# Altium PCB SahinbeyTeamCMSv1.0.PcbDoc
Units mm, origin at the board's own origin, x right, y up, seen from the top; angles counter-clockwise.
Board outline 60 x 60 mm, 2 copper layers (Top Layer, Bottom Layer), stack 1.535 mm thick; 40 components, 32 nets, 190 pads, 130 vias.
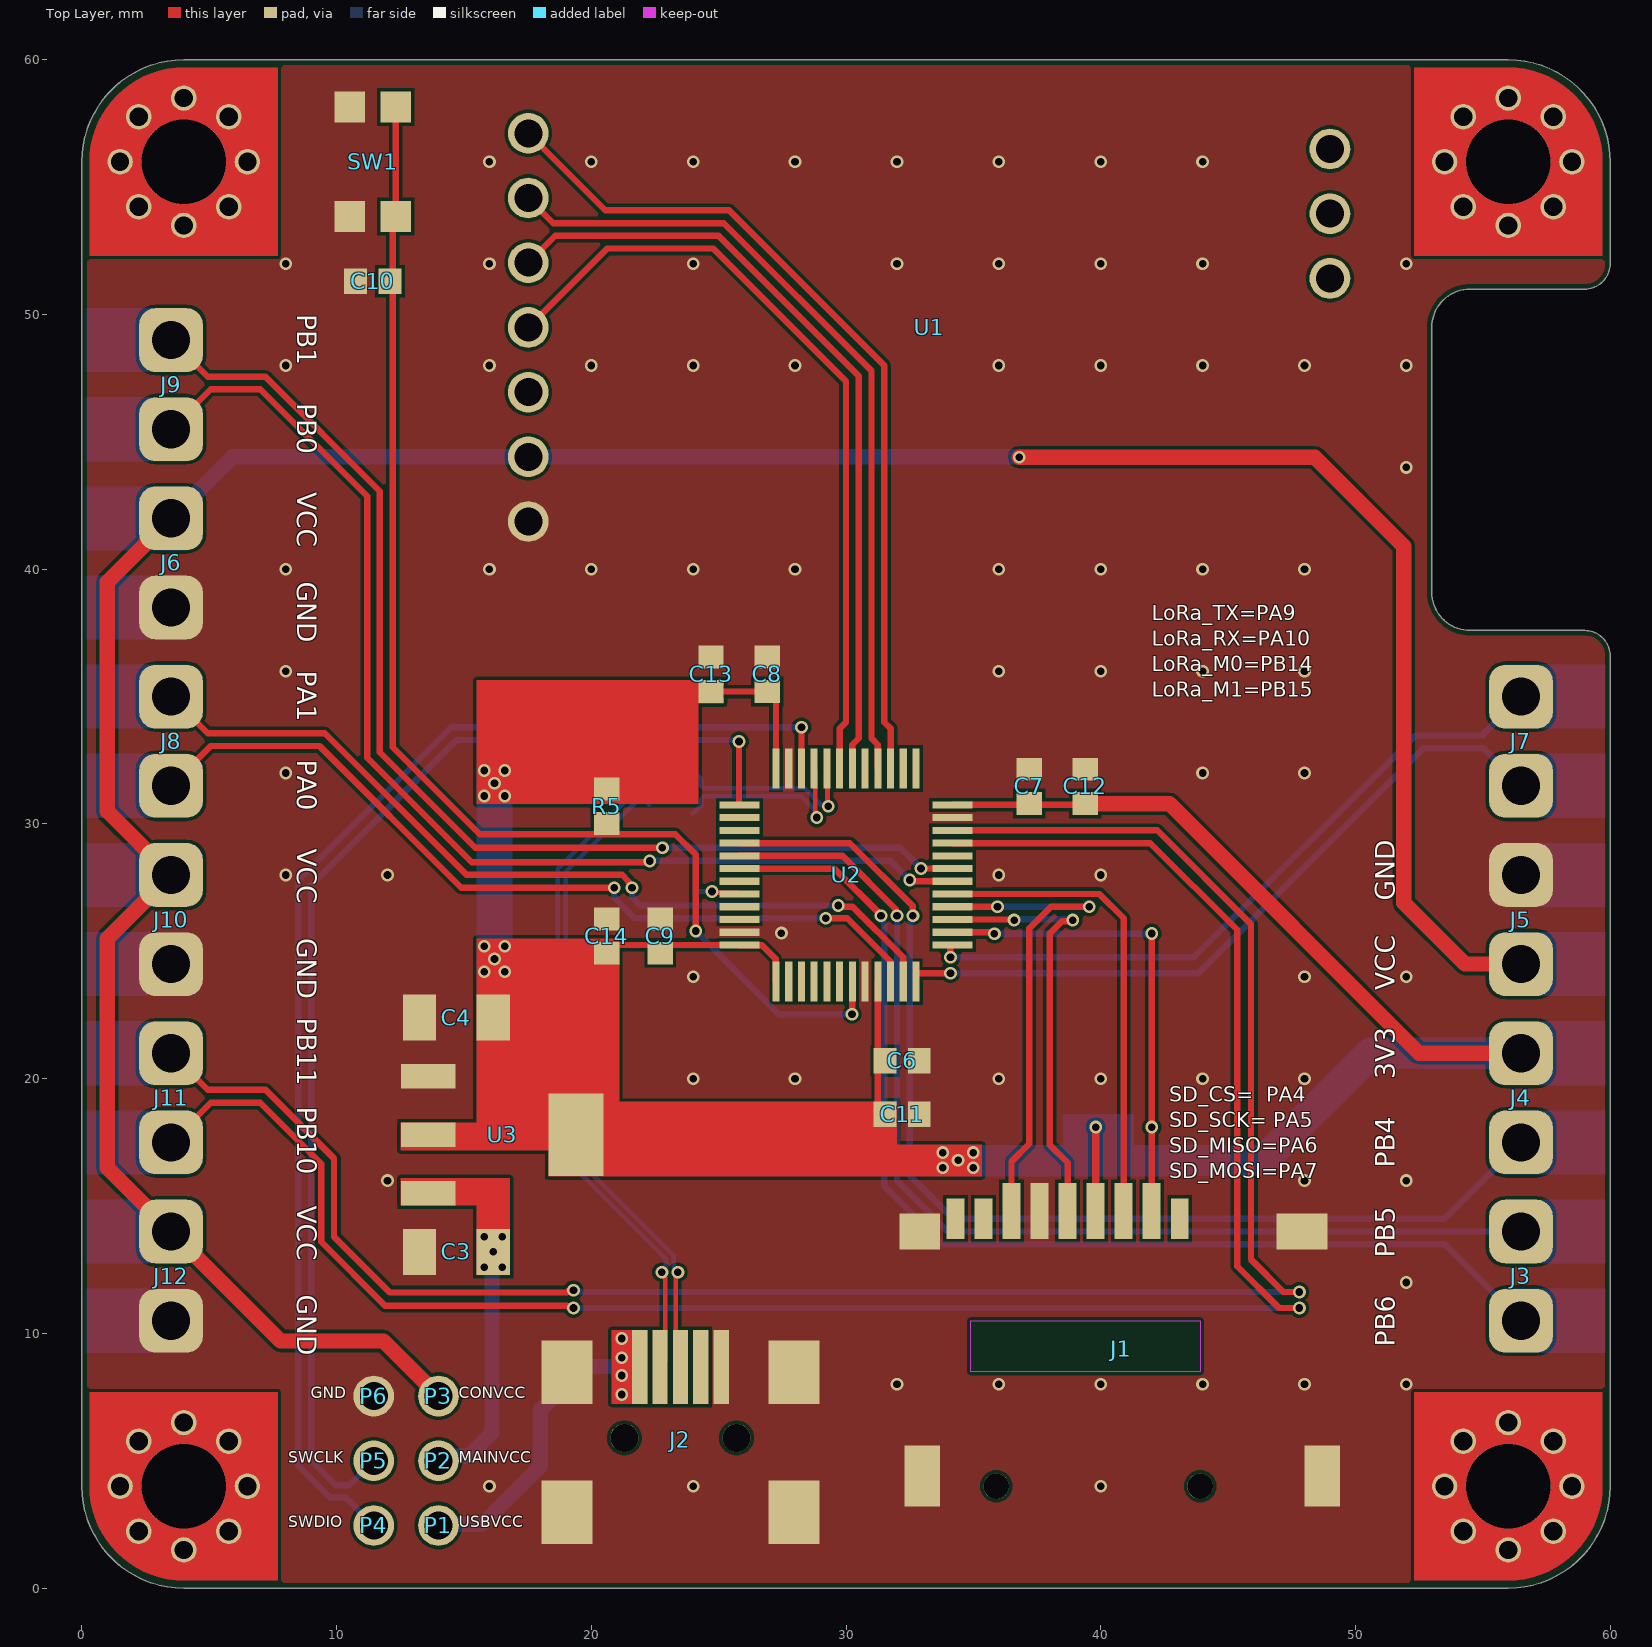
[diagram p0: Top Layer view]
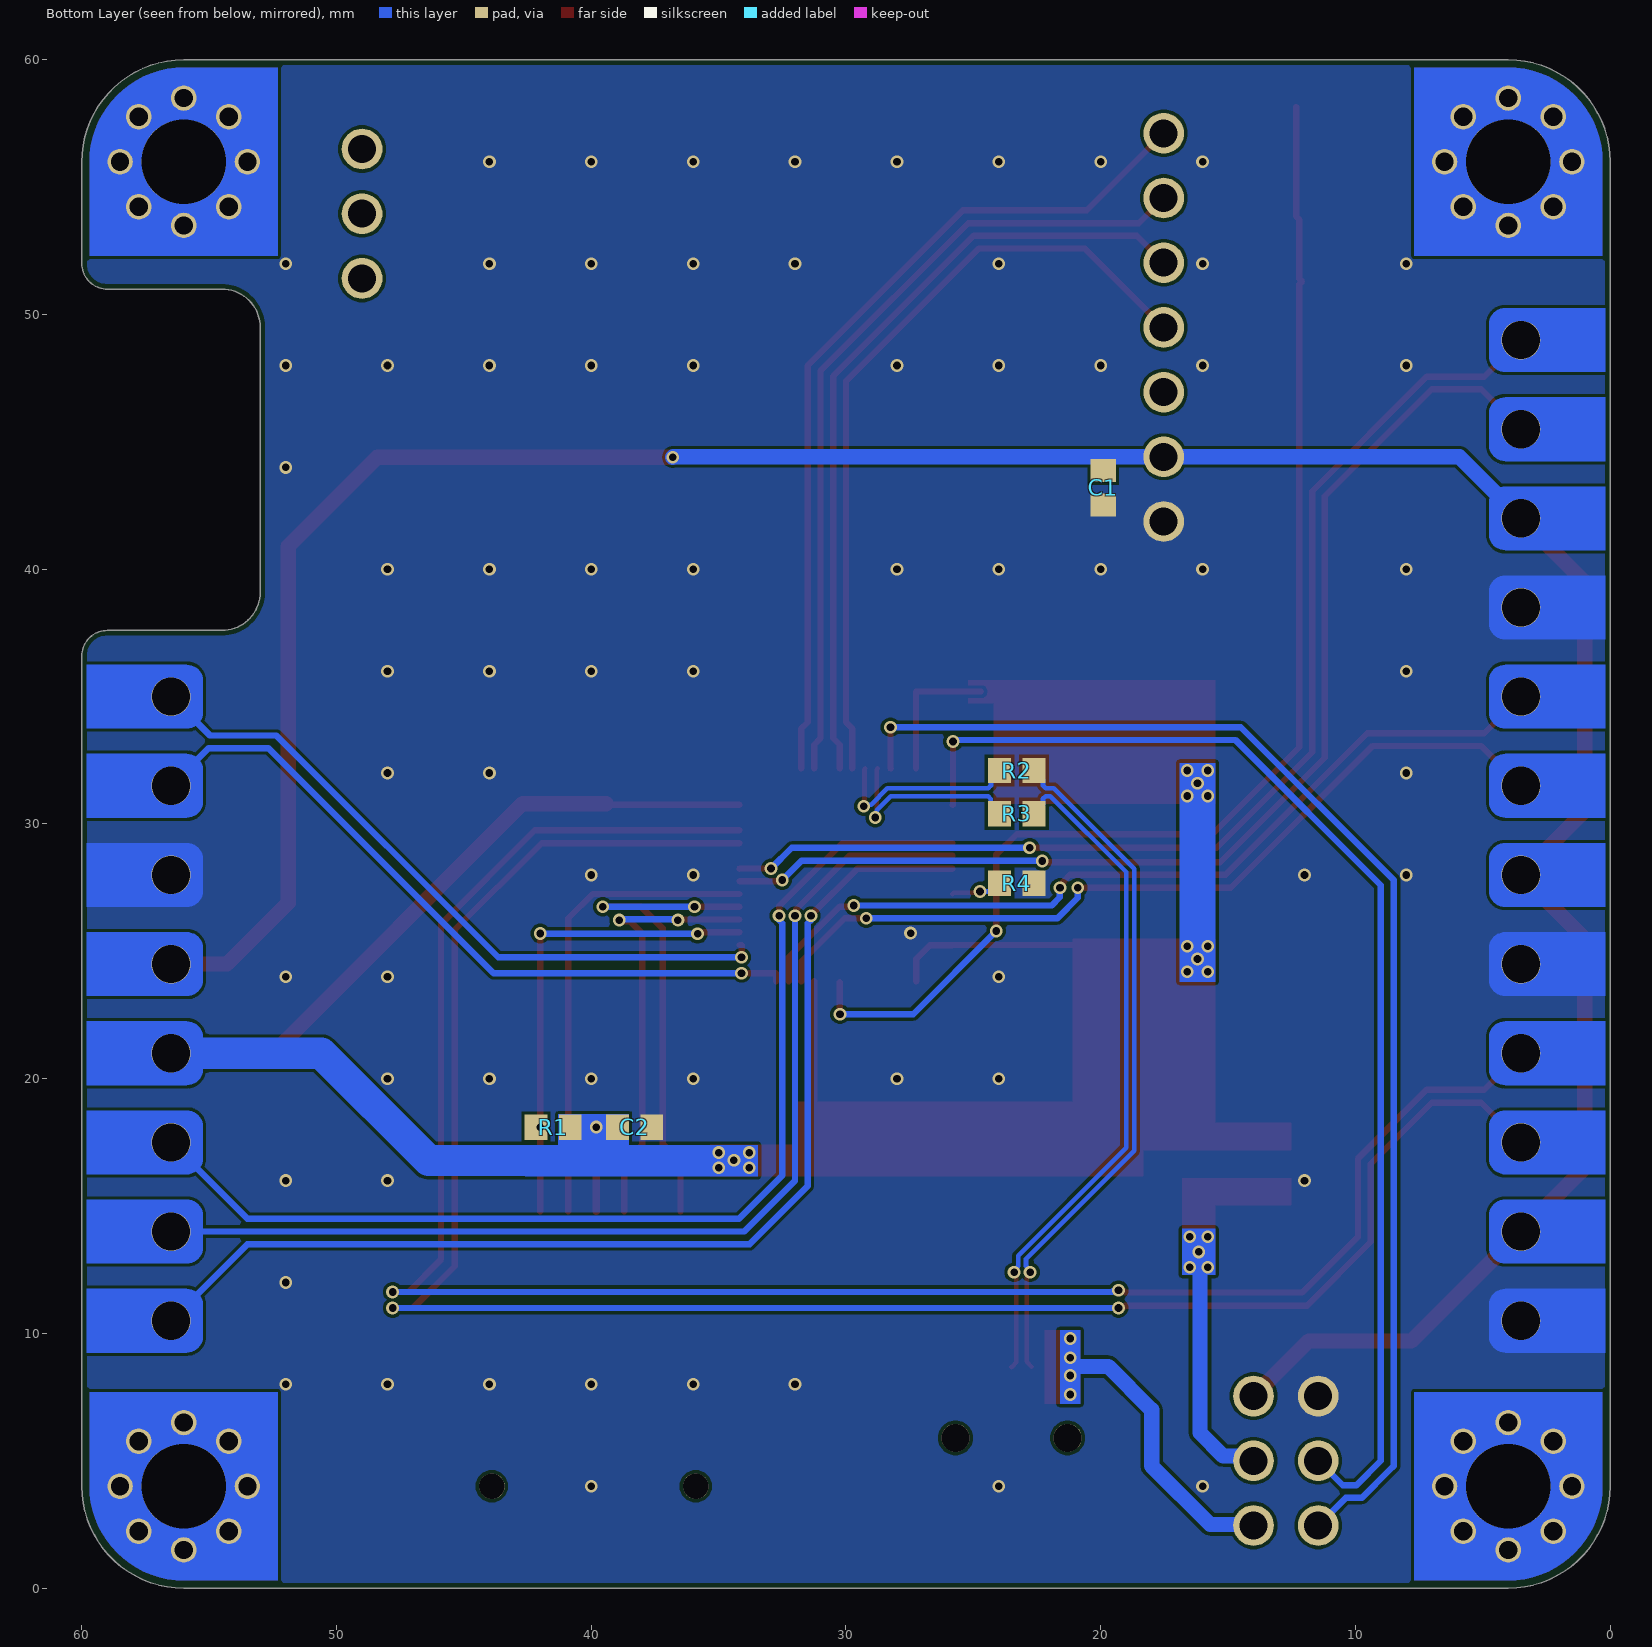
[diagram p1: Bottom Layer view, seen from below]
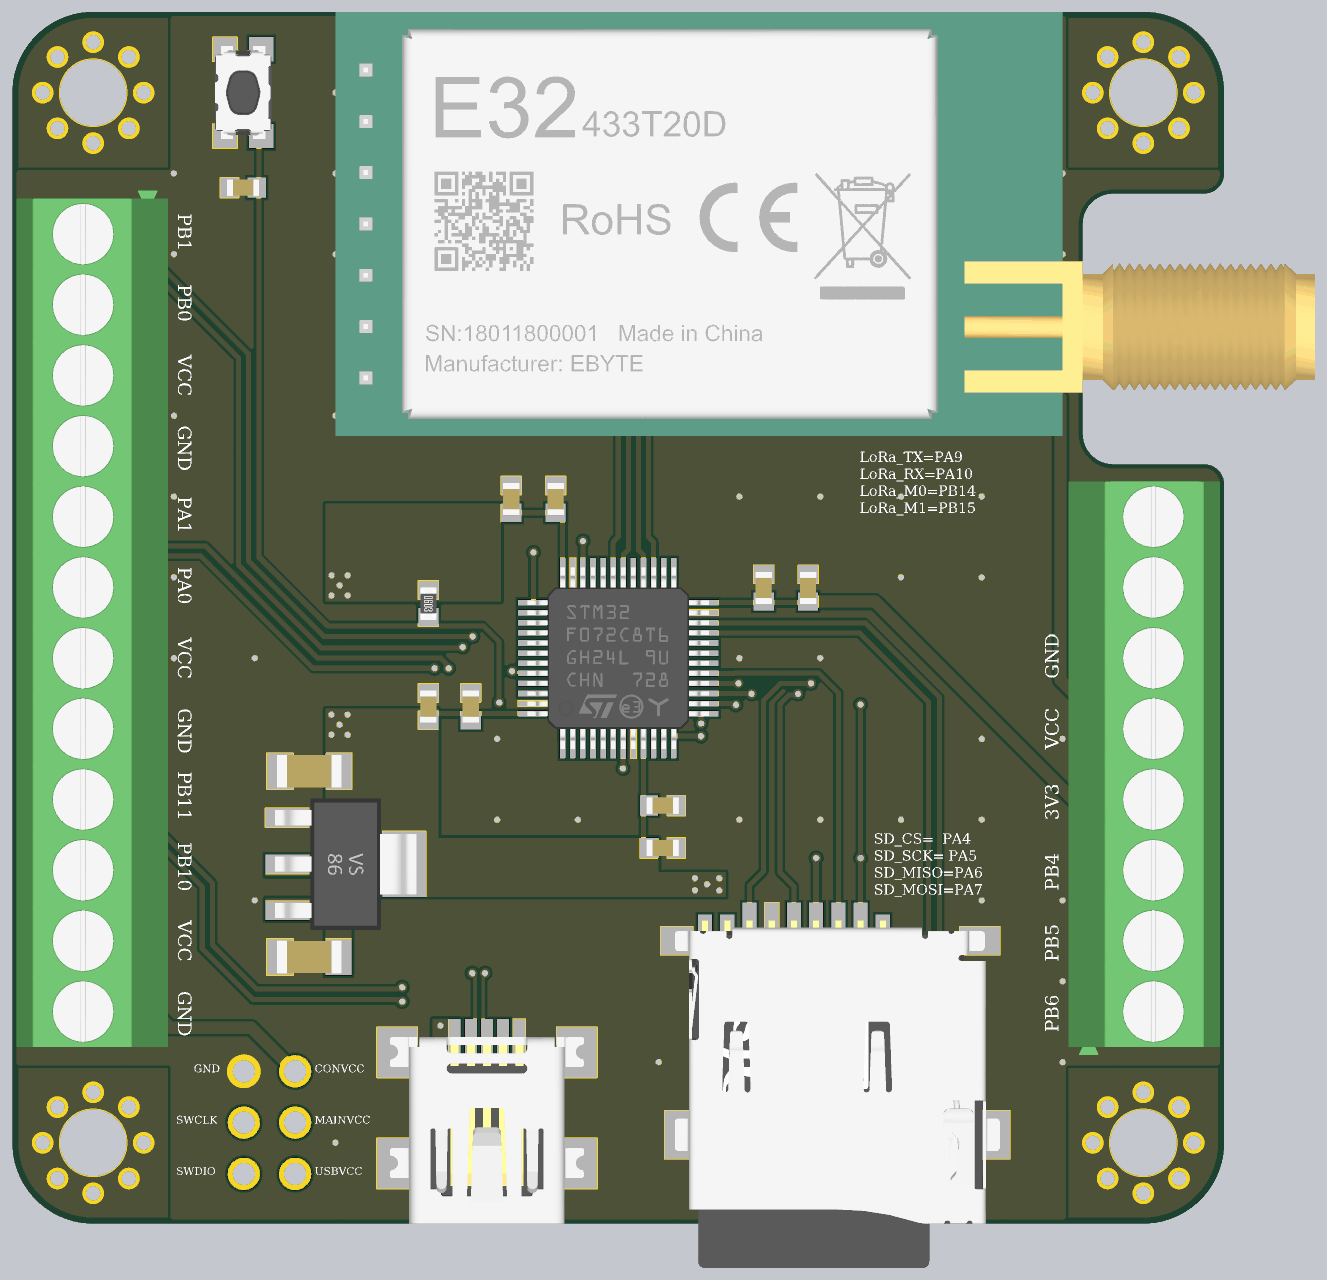
[diagram p2: 3D render of the assembled board from above, using the file's embedded part models]
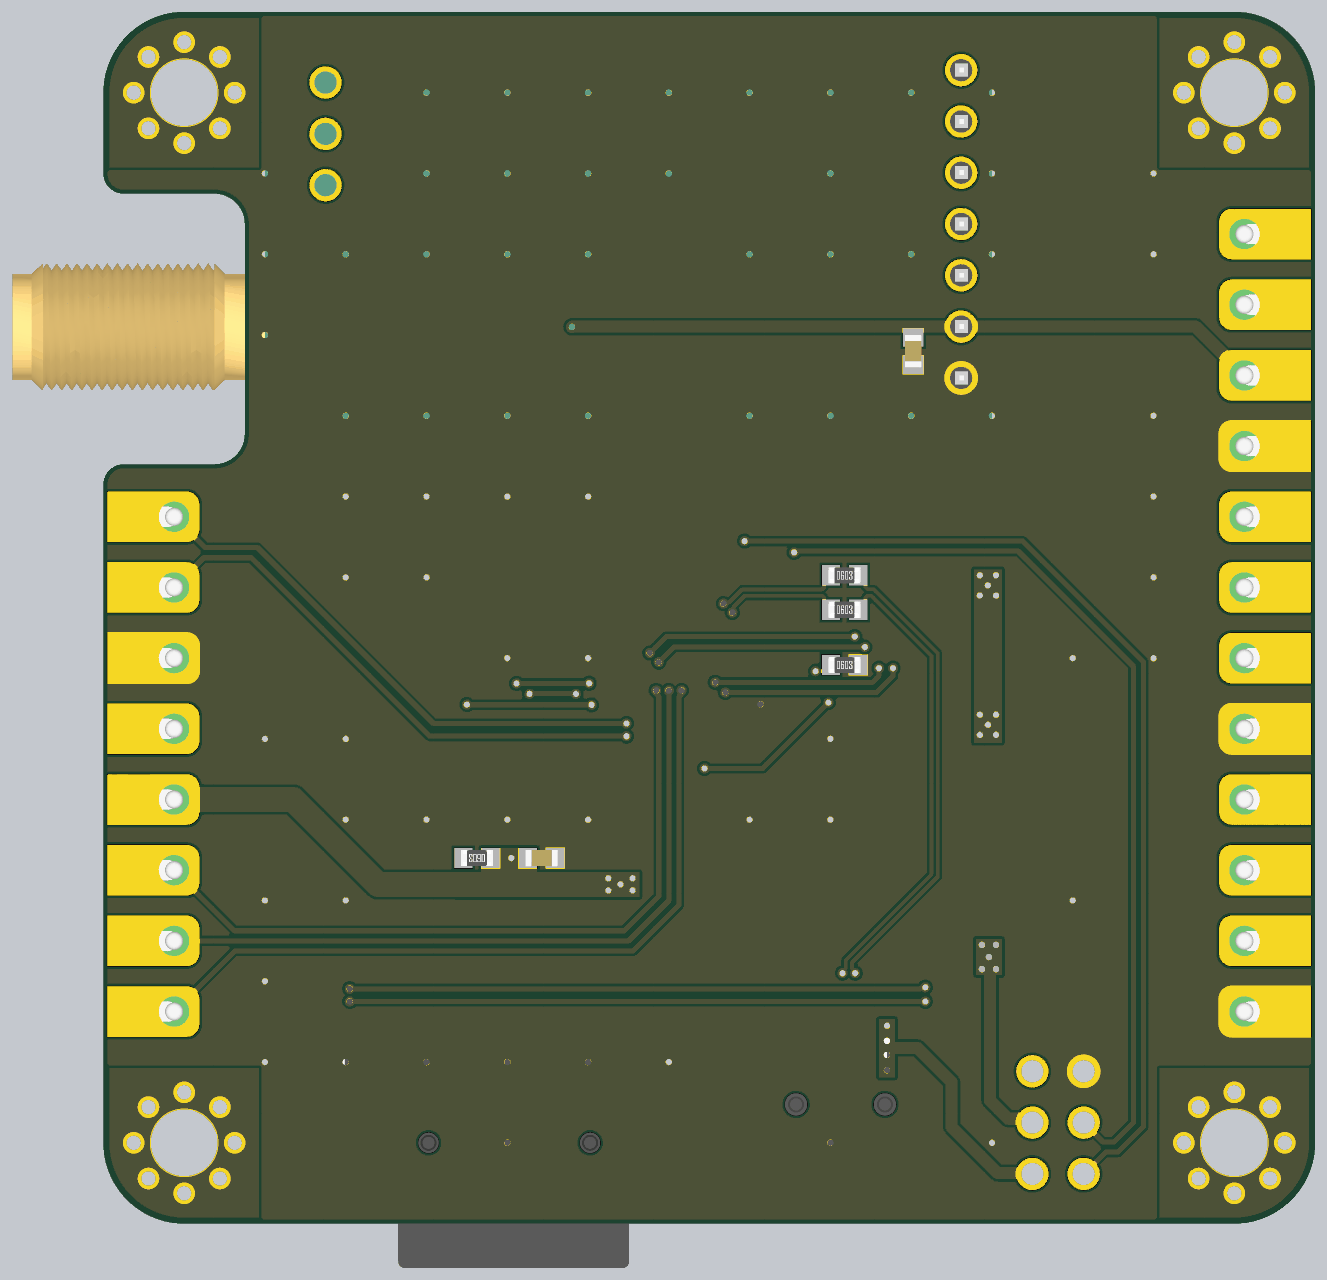
[diagram p3: 3D render of the assembled board from below, using the file's embedded part models]

## Layer stack, top to bottom
Top Solder: solder mask 0.0305, Solder Resist, Dk 3.5
Top Layer: signal copper 0.035
Dielectric 1: dielectric 1.465, FR-4, Dk 4.8
Bottom Layer: signal copper 0.035
Bottom Solder: solder mask 0.0305, Solder Resist, Dk 3.5

## Board outline
4,0 56,0 ccw(c56,4) 60,4 60,36.6 ccw(c59,36.6) 59,37.6 54.5,37.6 cw(c54.5,39.1) 53,39.1 53,49.5 cw(c54.5,49.5) 54.5,51 59,51 ccw(c59,52) 60,52 60,55.986 ccw(c56,56) 56,60 4,60 ccw(c4,56) 0,56 0,4 ccw(c4,4)

## Design rules (kind name [scope] priority, off if disabled: settings)
BoardOutlineClearance [All] p1: gap=0.2 ignorepadtopadclearanceinfootprint=FALSE
Clearance [All] p1: gap=0.127 ignorepadtopadclearanceinfootprint=FALSE
ComponentClearance [All] p1 off: gap=0.254 collisioncheckmode=3 verticalgap=0.254 showdistances=FALSE
DiffPairsRouting "Schematic Differential Pairs Routing_7" [InNet('RD_N')] p1: maxlimit=0.127 minlimit=0.127 mostfreqgap=0.127 toplayer_minwidth=0.184 toplayer_maxwidth=0.184 toplayer_prefwidth=0.184 bottomlayer_minwidth=0.184 bottomlayer_maxwidth=0.184 bottomlayer_prefwidth=0.184 impedanceprofiledriven=TRUE impedanceprofileid={07F03B65-2664-4A03-BD8C-8A38D9DFA35A} impedanceprofilevalue=90.000000 maxuncoupledlength=50.8
DiffPairsRouting "Schematic Differential Pairs Routing_1" [InNet('D_P')] p2: maxlimit=0.127 minlimit=0.127 mostfreqgap=0.127 toplayer_minwidth=0.184 toplayer_maxwidth=0.184 toplayer_prefwidth=0.184 bottomlayer_minwidth=0.184 bottomlayer_maxwidth=0.184 bottomlayer_prefwidth=0.184 impedanceprofiledriven=TRUE impedanceprofileid={07F03B65-2664-4A03-BD8C-8A38D9DFA35A} impedanceprofilevalue=90.000000 maxuncoupledlength=50.8
DiffPairsRouting "Schematic Differential Pairs Routing" [InNet('D_N')] p3: maxlimit=0.127 minlimit=0.127 mostfreqgap=0.127 toplayer_minwidth=0.184 toplayer_maxwidth=0.184 toplayer_prefwidth=0.184 bottomlayer_minwidth=0.184 bottomlayer_maxwidth=0.184 bottomlayer_prefwidth=0.184 impedanceprofiledriven=TRUE impedanceprofileid={07F03B65-2664-4A03-BD8C-8A38D9DFA35A} impedanceprofilevalue=90.000000 maxuncoupledlength=50.8
DiffPairsRouting "Schematic Differential Pairs Routing_2" [InNet('D_N')] p4: maxlimit=0.127 minlimit=0.127 mostfreqgap=0.127 toplayer_minwidth=0.184 toplayer_maxwidth=0.184 toplayer_prefwidth=0.184 bottomlayer_minwidth=0.184 bottomlayer_maxwidth=0.184 bottomlayer_prefwidth=0.184 impedanceprofiledriven=TRUE impedanceprofileid={07F03B65-2664-4A03-BD8C-8A38D9DFA35A} impedanceprofilevalue=90.000000 maxuncoupledlength=12.7
DiffPairsRouting [All] p5 off: maxlimit=0.254 minlimit=0.254 mostfreqgap=0.254 toplayer_minwidth=0.381 toplayer_maxwidth=0.381 toplayer_prefwidth=0.381 bottomlayer_minwidth=0.381 bottomlayer_maxwidth=0.381 bottomlayer_prefwidth=0.381 maxuncoupledlength=12.7
MinimumSolderMaskSliver [All] p1: minsoldermaskwidth=0.1
PlaneConnect [All] p1: planeconnectstyle=Direct reliefexpansion=0.508 reliefentries=4 reliefconductorwidth=0.254 reliefairgap=0.254
PolygonConnect [All] p1: connectstyle=Direct reliefconductorwidth=0.254 reliefentries=4 polygonreliefangle="90 Angle" airgapwidth=0.254
RoutingVias [All] p1: holewidth=0.3 width=0.5 viastyle="Through Hole" minholewidth=0.3 minwidth=0.45 maxholewidth=0.711 maxwidth=3
SolderMaskExpansion [All] p1: expansion=0.035 istentingtop=FALSE
UnRoutedNet [All] p1: checkbadconnections=TRUE
Width [All] p1: maxlimit=3 minlimit=0.127 preferedwidth=0.25 minimp=50.000000 maximp=50.000000 favimp=50.000000
25 further rules are at their usual default settings.

## Classes and differential pairs
differential pair RD: +RD_P -RD_N
differential pair D: +D_P -D_N

## Components (designator, comment, footprint, x,y, rotation, side; value= is the part's Value field where it differs from the comment)
C1 "0603, 1uF" "CAP 0603_1608" 19.9,43.2 r90 bottom
C2 "0603, 1uF" "CAP 0603_1608" 38.3,18.1 r0 bottom
C3 "1206, 10uF" "CAP 1206_3216" 14.7,13.2 r0 top
C4 "1206, 10uF" "CAP 1206_3216" 14.7,22.4 r0 top
C6 "0603, 0.1uF" "CAP 0603_1608" 32.2,20.7 r180 top
C7 "0603, 0.1uF" "CAP 0603_1608" 37.2,31.475 r270 top
C8 "0603, 0.1uF" "CAP 0603_1608" 26.9,35.875 r270 top
C9 "0603, 0.1uF" "CAP 0603_1608" 22.7,25.6 r270 top
C10 "0603, 0.1uF" "CAP 0603_1608" 11.425,51.3 r0 top
C11 "0603, 1uF" "CAP 0603_1608" 32.2,18.6 r180 top
C12 "0603, 1uF" "CAP 0603_1608" 39.4,31.475 r270 top
C13 "0603, 1uF" "CAP 0603_1608" 24.7,35.875 r270 top
C14 "0603, 1uF" "CAP 0603_1608" 20.6,25.6 r270 top
J1 "L-KLS1-TF-003-H1.85-R" L-KLS1-TF-003-H1.85-R 40.85,7.65 r0 top
J2 "L-KLS1-229-5FB-B-R" L-KLS1-229-5FB-B-R 23.5,5.9 r0 top
J3 "KF350-2P" KF350-2P 56.5,10.5 r90 top
J4 "KF350-2P" KF350-2P 56.5,17.5 r90 top
J5 "KF350-2P" KF350-2P 56.5,24.5 r90 top
J6 "KF350-2P" KF350-2P 3.5,42 r270 top
J7 "KF350-2P" KF350-2P 56.5,31.5 r90 top
J8 "KF350-2P" KF350-2P 3.5,35 r270 top
J9 "KF350-2P" KF350-2P 3.5,49 r270 top
J10 "KF350-2P" KF350-2P 3.5,28 r270 top
J11 "KF350-2P" KF350-2P 3.5,21 r270 top
J12 "KF350-2P" KF350-2P 3.5,14 r270 top
P1 "Pad" PAD 14,2.46 r180 top
P2 "Pad" PAD 14,5 r180 top
P3 "Pad" PAD 14,7.54 r180 top
P4 "Pad" PAD 11.46,2.46 r180 top
P5 "Pad" PAD 11.46,5 r180 top
P6 "Pad" PAD 11.46,7.54 r180 top
R1 "0603, 10K" "RES 0603_1608" 41.5,18.1 r0 bottom
R2 "0603, ?R/K" "RES 0603_1608" 23.3,32.1 r180 bottom
R3 "0603, 22R" "RES 0603_1608" 23.3,30.4 r180 bottom
R4 "0603, 10K" "RES 0603_1608" 23.3,27.667 r180 bottom
R5 "0603, 10K" "RES 0603_1608" 20.6,30.7 r270 top
SW1 "KMR621NGLFS" SW_KMR621NGLFS 11.425,56 r90 top
U1 "E32-433T20D" E32-433T20D 16,39 r0 top
U2 "STM32F072C8T6" STM32F072C8T6 30,28 r90 top
U3 "TLV1117-33IDCYR" SOT230P700X180-4N 16.5,17.8 r0 top

## Footprints (in the part's own frame and the unit in brackets; to place one, negate y for a bottom-side part, rotate by r counter-clockwise, add the part's x,y. Pads: shape width x height; smd on the part's side, far side on the other; paste and mask are expansions set on the pad)
"CAP 0603_1608" [mm] "Chip Capacitor, 2-Leads, Body 1.60x0.80mm, IPC Medium Density"
  rect 0.9x1 smd: 1(-0.675,0) 2(0.675,0)
  body extent -0.8,-0.41 0.8,0.41, height 0.82
"CAP 1206_3216" [mm] "Chip Capacitor, 2-Leads, Body 3.25x1.60mm, IPC Medium Density"
  rect 1.3x1.8 smd: 1(-1.45,0) 2(1.45,0)
  body extent -1.6,-0.81 1.6,0.81, height 1.62
E32-433T20D [mm]
  round 1.6 hole 1.1: 1(1.526,18.115) 2(1.526,15.575) 3(1.526,13.035) 4(1.526,10.495) 5(1.526,7.955) 6(1.526,5.415) 7(1.526,2.875) 8(33,12.42) 9(33,14.96) 10(33,17.5)
  body extent 0,0 48.5,21, height 7.56
KF350-2P [mm]
  rrect50% 2.5x2.5 / inner round 1.525 / far side round 1.525 hole 1.5: 1(0,0) 2(3.5,0)
  Bottom Layer region: -1.25,-3.3 -1.25,0.625 -1.202,0.864 -1.067,1.067 -0.864,1.202 -0.625,1.25 -0.625,1.25 0.625,1.25 0.864,1.202 1.067,1.067 1.202,0.864 1.25,0.625 1.25,0.625 1.25,-3.3
  Bottom Layer region: 2.25,-3.3 2.25,0.625 2.298,0.864 2.433,1.067 2.636,1.202 2.875,1.25 2.875,1.25 4.125,1.25 4.364,1.202 4.567,1.067 4.702,0.864 4.75,0.625 4.75,0.625 4.75,-3.3
  body extent -2.15,-3.3 5.25,4.2, height 10
L-KLS1-229-5FB-B-R [mm]
  rect 0.6x2.9 smd: 1(-1.6,2.78) 2(-0.8,2.78) 3(0,2.78) 4(0.8,2.78) 5(1.6,2.78)
  rect 2x2.5 smd: 5(-4.45,-2.92) 5(-4.45,2.58) 5(4.45,-2.92) 5(4.45,2.58)
  round 1.1 hole 1.1 unplated: ""(-2.2,0) ""(2.2,0)
  body extent -4.8,-5.9 4.8,3.35, height 3.9
L-KLS1-TF-003-H1.85-R [mm]
  rect 0.7x1.6 smd: 1(2.25,6.85) 8(-5.45,6.85) 9(-6.55,6.85)
  rect 0.7x2.2 smd: 2(1.15,7.15) 3(0.05,7.15) 4(-1.05,7.15) 5(-2.15,7.15) 6(-3.25,7.15) 7(-4.35,7.15)
  rect 1.6x1.4 smd: 6(-7.95,6.35)
  rect 1.4x2.4 smd: 6(-7.85,-3.25) 6(7.85,-3.25)
  rect 2x1.4 smd: 6(7.05,6.35)
  round 1 hole 1 unplated: ""(-4.95,-3.65) ""(3.05,-3.65)
  Top Layer keep-out region: -5.95,2.85 3.05,2.85 3.05,0.85 -5.95,0.85
  body extent -8.05,-9.85 8.05,7.35, height 1.9
PAD [mm]
  round 1.6 hole 1.1: 1(0,0)
"RES 0603_1608" [mm] "Chip Resistor, 2-Leads, Body 1.60x0.80mm, IPC Medium Density"
  rect 0.9x1 smd: 1(-0.675,0) 2(0.675,0)
  body extent -0.8,-0.4 0.8,0.4, height 0.45
SOT230P700X180-4N [mm]
  rect 2.15x0.95 smd: 1(-2.9,2.3) 2(-2.9,0) 3(-2.9,-2.3)
  rect 2.15x3.25 smd: 2(2.9,0)
  body extent -3.5,-3.25 3.5,3.25, height 1.81
STM32F072C8T6 [mm]
  rect 1.56x0.28 smd: 1(-4.18,2.75) 2(-4.18,2.25) 3(-4.18,1.75) 4(-4.18,1.25) 5(-4.18,0.75) 6(-4.18,0.25) 7(-4.18,-0.25) 8(-4.18,-0.75) 9(-4.18,-1.25) 10(-4.18,-1.75) 11(-4.18,-2.25) 12(-4.18,-2.75) 25(4.18,-2.75) 26(4.18,-2.25) 27(4.18,-1.75) 28(4.18,-1.25) 29(4.18,-0.75) 30(4.18,-0.25) 31(4.18,0.25) 32(4.18,0.75) 33(4.18,1.25) 34(4.18,1.75) 35(4.18,2.25) 36(4.18,2.75)
  rect 0.28x1.56 smd: 13(-2.75,-4.18) 14(-2.25,-4.18) 15(-1.75,-4.18) 16(-1.25,-4.18) 17(-0.75,-4.18) 18(-0.25,-4.18) 19(0.25,-4.18) 20(0.75,-4.18) 21(1.25,-4.18) 22(1.75,-4.18) 23(2.25,-4.18) 24(2.75,-4.18) 37(2.75,4.18) 38(2.25,4.18) 39(1.75,4.18) 40(1.25,4.18) 41(0.75,4.18) 42(0.25,4.18) 43(-0.25,4.18) 44(-0.75,4.18) 45(-1.25,4.18) 46(-1.75,4.18) 47(-2.25,4.18) 48(-2.75,4.18)
  body extent -4.5,-4.5 4.5,4.5, height 1.61
SW_KMR621NGLFS [mm]
  rect 1.2x1.2 smd: 1(-2.15,0.9) 1(2.15,0.9) 2(-2.15,-0.9) 2(2.15,-0.9)
  body extent -2.3,-1.4 2.3,1.4, height 1.9

## Part data
C1 C2 C6 C7 C8 C9 C10 C11 C12 C13 C14: library part "0603 Kapasitör"
C3 C4: library part "1206 Kapasitör"
R1 R2 R3 R4 R5: library part "0603 Direnç"

## Free pads (board coordinates)
  round 1 hole 0.712: 1(1.5,4) 1(1.5,56) 1(2.232,2.232) 1(2.232,5.768) 1(2.232,54.232) 1(2.232,57.768) 1(4,1.5) 1(4,6.5) 1(4,53.5) 1(4,58.5) 1(5.768,2.232) 1(5.768,5.768) 1(5.768,54.232) 1(5.768,57.768) 1(6.5,4) 1(6.5,56) 1(53.5,4) 1(53.5,56) 1(54.232,2.232) 1(54.232,5.768) 1(54.232,54.232) 1(54.232,57.768) 1(56,1.5) 1(56,6.5) 1(56,53.5) 1(56,58.5) 1(57.768,2.232) 1(57.768,5.768) 1(57.768,54.232) 1(57.768,57.768) 1(58.5,4) 1(58.5,56)
  round 3.325 hole 3.3: 1(4,4) 1(4,56) 1(56,4) 1(56,56)

## Via types
v1: diameter 0.5, hole 0.3, Top Layer to Bottom Layer, tented both sides, 130 vias

## Nets (pads, with @x,y where several pads share a name; then routed paths per layer and width w, separated by ;. In a path a pad name is that pad's centre, name@x,y a point inside that pad or via, vN(x,y) a via of type N, cw(c..) or ccw(c..) an arc to the next point about the centre after c; other vN are vias at no path point)
3.3V: C2.2 C4.2 C6.2 C7.2 C8.2 C9.2 C11.2 C12.2 C13.2 C14.2 J1.4 J4.2 R1.1 R5.1 U2.1 U2.9 U2.24 U2.36 U2.48 U3.2 | length 64.3
  Top Layer w0.25: C14.2 20.925,25.25 U2.48 25.835,25.235 26.703,25.235 27.235,24.703 27.235,23.835 U2.1 ; C13.2 C8.2 27.25,35.2 U2.36 ; U2.9 31.25,18.875 C11.2 ; U2.24 39.35,30.75 C12.2
  Top Layer w0.3: J1.4 v1(39.8,18.1)
  Top Layer w0.6: C12.2 42.7,30.8 52.5,21 J4.2
  Bottom Layer w1.236: 42.455,16.789 46.389,16.789 50.6,21 J4.2
  other v1: 33.8,16.5 35,16.5 34.4,16.8 33.8,17.1 35,17.1 15.8,24.2 16.6,24.2 16.2,24.7 15.8,25.2 16.6,25.2 15.8,31.1 16.6,31.1 16.2,31.6 15.8,32.1 16.6,32.1
ADC_IN8: J9.2 U2.18 | length 45.4
  Top Layer w0.25: J9.2 5.062,47.062 7,47.062 11.2,42.862 11.2,32.607 15.307,28.5 22.249,28.5 v1(22.296,28.547) ; v1(32.5,27.8) 32.568,27.8 32.618,27.75 U2.18
  Bottom Layer w0.25: v1@22.301,28.552 31.748,28.552 v1(32.5,27.8)
ADC_IN9: J9.1 U2.19 | length 45.3
  Top Layer w0.25: J9.1 4.939,47.561 7.207,47.561 11.7,43.069 11.7,32.814 15.448,29.067 v1(22.792,29.067) ; v1(32.943,28.252) 32.944,28.251 34.179,28.251 U2.19
  Bottom Layer w0.25: v1(22.792,29.067) 22.797,29.062 32.134,29.062 v1(32.943,28.252)
D_N: J2.2 R2.2 | length 26.7
  Top Layer w0.184: J2.2@22.717,8.697 22.906,8.886 22.906,12.182 22.773,12.314 v1(22.773,12.4)
  Bottom Layer w0.184: R2.2@22.267,31.742 22.267,31.513 22.159,31.405 21.851,31.405 18.689,28.244 18.689,17.168 22.931,12.926 22.931,12.644 22.773,12.486 v1(22.773,12.4)
D_P: J2.3 R3.2 | length 26.1
  Top Layer w0.184: v1(23.4,12.4) 23.4,12.314 23.31,12.224 23.31,8.87 J2.3
  Bottom Layer w0.184: R3.2@22.267,30.758 22.267,30.987 22.159,31.095 21.979,31.095 19,28.115 19,17.297 23.242,13.055 23.242,12.644 23.4,12.486 v1(23.4,12.4)
GND: C1.1 C2.1 C3.1 C4.1 C6.1 C7.1 C8.1 C9.1 C10.1 C11.1 C12.1 C13.1 C14.1 J1.6 J2.5 J5.2 J6.2 J10.2 J12.2 P6.1 R4.2 SW1.1 U1.7 U2.8 U2.23 U2.35 U2.47 U3.1
  other v1: 16,4 24,4 40,4 32,8 36,8 40,8 44,8 48,8 52,8 52,12 12,16 48,16 52,16 24,20 28,20 36,20 40,20 44,20 48,20 24,24 48,24 52,24 27.464,25.718 8,28 12,28 36,28 40,28 8,32 44,32 48,32 8,36 36,36 40,36 44,36 48,36 8,40 16,40 20,40 24,40 28,40 36,40 40,40 44,40 48,40 52,44 8,48 16,48 20,48 24,48 28,48 36,48 40,48 44,48 48,48 52,48 8,52 16,52 24,52 32,52 36,52 40,52 44,52 52,52 16,56 20,56 24,56 28,56 32,56 36,56 40,56 44,56
LoRa_M0: U1.1 U2.27 | length 33.7
  Top Layer w0.25: U1.1 20.55,54.092 25.408,54.092 31.5,48 31.5,34 31.75,33.75 U2.27
LoRa_M1: U1.2 U2.28 | length 32
  Top Layer w0.25: U1.2 18.51,53.592 25.201,53.592 31,47.793 31,33.36 31.25,33.11 U2.28
LoRa_RX: U1.4 U2.31 | length 31.2
  Top Layer w0.25: U1.4 20.623,52.592 24.787,52.592 30,47.379 30,34 29.75,33.75 U2.31
LoRa_TX: U1.3 U2.30 | length 31.2
  Top Layer w0.25: U1.3 18.583,53.092 24.994,53.092 30.5,47.586 30.5,33.36 30.25,33.11 U2.30
MAIN_VCC: C3.2 P2.1 U3.3 | length 9.2
  Bottom Layer w0.6: P2.1 14.191,5.191 15.191,5.191 16.1,6.1 16.1,12.7
  other v1: 15.8,12.6 16.5,12.6 16.15,13.2 15.8,13.8 16.5,13.8
NetC10_2: C10.2 R5.2 SW1.2 U2.7 | length 50.7
  Top Layer w0.25: SW1.2@12.325,58.15 12.325,53.85 12.209,53.734 12.209,51.409 C10.2 12.202,51.198 12.202,33.014 15.617,29.6 23.3,29.6 24.1,28.8 v1(24.1,25.8) ; v1(30.234,22.536) 30.242,22.544 30.242,23.782 U2.7@30.239,23.784
  Bottom Layer w0.25: v1(24.1,25.8) 27.364,22.536 v1(30.234,22.536)
NetR4_1: R4.1 U2.44 | length 1.8
  Top Layer w0.184: v1(24.737,27.351) 24.791,27.298 25.772,27.298 U2.44
  Bottom Layer w0.184: R4.1@24.045,27.3 24.096,27.351 v1(24.737,27.351)
Nextion_RX: J11.1 U2.22 | length 78.9
  Top Layer w0.25: J11.1 4.939,19.562 7.207,19.562 9.9,16.869 9.9,13.8 12.093,11.607 19.03,11.607 19.075,11.652 19.252,11.652 v1(19.3,11.7) ; U2.22 42.217,29.75 45.9,26.067 45.9,12.9 47.173,11.627 v1(47.8,11.627)
  Bottom Layer w0.25: v1(19.3,11.7) 19.348,11.652 19.525,11.652 19.55,11.627 v1(47.8,11.627)
Nextion_TX: J11.2 U2.21 | length 79
  Top Layer w0.25: J11.2 5.062,19.062 7,19.062 9.4,16.662 9.4,13.593 11.9,11.093 19.03,11.093 19.075,11.048 19.252,11.048 v1(19.3,11) ; U2.21 41.95,29.25 45.358,25.842 45.358,12.642 47,11 v1(47.8,11)
  Bottom Layer w0.25: v1(19.3,11) v1(47.8,11)
PB4: J4.1 U2.40 | length 44.4
  Top Layer w0.25: U2.40 30.15,29.25 32.622,26.778 32.622,26.405 v1(32.627,26.4)
  Bottom Layer w0.25: v1(32.627,26.4) 32.627,26.227 32.5,26.1 32.5,16.2 34.2,14.5 53.5,14.5 J4.1
PB5: J3.2 U2.41 | length 43
  Top Layer w0.25: U2.41 29.861,28.75 31.952,26.659 31.952,26.448 v1(32,26.4)
  Bottom Layer w0.25: v1(32,26.4) 32,15.993 33.993,14 J3.2
PB6: J3.1 U2.42 | length 44.2
  Top Layer w0.25: U2.42 29.55,28.25 31.373,26.427 v1(31.373,26.4)
  Bottom Layer w0.25: v1(31.373,26.4) 31.373,26.227 31.5,26.1 31.5,15.786 33.786,13.5 53.5,13.5 J3.1
RD_N: R2.1 U2.32 | length 7.6
  Top Layer w0.184: U2.32 29.275,32.155 29.275,30.725 v1(29.3,30.7)
  Bottom Layer w0.184: R2.1 24.307,31.768 24.307,31.513 24.42,31.4 28.376,31.4 29.016,30.76 29.24,30.76 v1(29.3,30.7)
RD_P: R3.1 U2.33 | length 7.8
  Top Layer w0.184: U2.33 28.798,32.132 28.798,30.315 v1(28.857,30.257)
  Bottom Layer w0.184: R3.1 24.312,30.737 24.312,30.981 24.42,31.089 28.248,31.089 28.796,30.541 28.796,30.317 v1(28.857,30.257)
SD_CS: J1.2 R1.2 U2.14 | length 18.8
  Top Layer w0.25: U2.14 35.696,25.75 35.759,25.686 v1(35.827,25.686) ; J1.2 v1(42,18.1) v1(42,25.7)
  Bottom Layer w0.25: v1(35.827,25.686) 35.834,25.693 41.993,25.693 v1(42,25.7)
SD_MISO: J1.7 U2.16 | length 19.5
  Top Layer w0.25: U2.16 34.181,26.751 v1(35.948,26.752) v1(35.948,26.752) ; J1.7 36.5,16.751 37.2,17.451 37.2,25.9 38.048,26.748 v1(39.545,26.748)
  Bottom Layer w0.25: v1(35.948,26.752) 35.95,26.75 39.543,26.75 v1(39.545,26.748)
SD_MOSI: J1.3 U2.17 | length 18.6
  Top Layer w0.25: U2.17 35.736,27.25 35.74,27.254 39.946,27.254 40.9,26.3 J1.3
SD_SCK: J1.5 U2.15 | length 17.1
  Top Layer w0.25: U2.15 36.577,26.25 v1(36.6,26.227) ; J1.5 38.7,16.7 38,17.4 38,25.7 38.479,26.179 38.852,26.179 v1(38.9,26.227)
  Bottom Layer w0.25: v1(36.6,26.227) 36.621,26.248 36.825,26.248 36.833,26.256 38.871,26.256 v1(38.9,26.227)
Serial_RX: J7.2 U2.13 | length 27.2
  Top Layer w0.25: v1(34.1,24.763) 34.1,25.235 34.115,25.25 U2.13
  Bottom Layer w0.25: v1(34.1,24.763) 43.656,24.763 52.365,33.472 54.972,33.472 J7.2
Serial_TX: J7.1 U2.12 | length 28.3
  Top Layer w0.25: U2.12 32.75,24.122 32.765,24.136 v1(34.1,24.136)
  Bottom Layer w0.25: v1(34.1,24.136) 43.837,24.136 52.672,32.972 55.028,32.972 J7.1
SWCLK: P5.1 U2.37 | length 47.5
  Top Layer w0.25: v1(25.8,33.236) 25.8,30.765 25.815,30.75 U2.37
  Bottom Layer w0.25: P5.1 10.501,4.041 9.959,4.041 9,5 9,27.593 14.707,33.3 25.736,33.3 v1(25.8,33.236)
SWDIO: P4.1 U2.34 | length 50.8
  Top Layer w0.25: U2.34@28.251,32.181 v1@28.251,33.796
  Bottom Layer w0.25: P4.1 10.379,3.541 9.751,3.541 8.646,4.646 8.5,4.793 8.5,27.8 14.497,33.797 v1(28.251,33.797)
USBVCC: J2.1 P1.1 | length 11.1
  Bottom Layer w0.6: P1.1 14.04,2.5 15.7,2.5 18,4.8 18,7 19.7,8.7 21.2,8.7
  other v1: 21.2,7.6 21.2,8.35 21.2,9.05 21.2,9.8
VCC: C1.2 J5.1 J6.1 J10.1 J12.1 P3.1 U1.6 | length 115.8
  Top Layer w0.6: J6.1 1,39.5 1,30.5 J10.1 1,25.5 1,16.5 J12.1 7.8,9.7 11.84,9.7 P3.1 ; v1(36.8,44.4) 48.4,44.4 51.9,40.9 51.9,26.9 54.3,24.5 J5.1
  Bottom Layer w0.6: J6.1 5.915,44.415 U1.6 36.785,44.415 v1(36.8,44.4)
VESC_RX: J8.1 U2.11 | length 34.2
  Top Layer w0.25: J8.1 4.939,33.562 9.539,33.562 15.098,28.002 21.211,28.002 21.475,27.738 21.475,27.693 21.6,27.568 v1(21.6,27.5) ; v1(29.7,26.8) 29.748,26.752 30.256,26.752 32.244,24.764 32.244,23.826 U2.11
  Bottom Layer w0.25: v1(21.6,27.5) 21.605,27.495 21.605,27.121 21.924,26.802 29.698,26.802 v1(29.7,26.8)
VESC_TX: J8.2 U2.10 | length 33.4
  Top Layer w0.25: J8.2 5.062,33.062 9.331,33.062 14.893,27.5 v1(20.9,27.5) ; v1(29.2,26.3) 29.202,26.298 30.048,26.298 31.735,24.611 31.735,23.835 U2.10
  Bottom Layer w0.25: v1(20.9,27.5) 20.9,27.1 21.698,26.302 29.198,26.302 v1(29.2,26.3)
pads on no net: J1. J1.1 J1.8 J1.9 J2. J2.4 U1.5 U1.8 U1.9 U1.10 U2.2 U2.3 U2.4 U2.5 U2.6 U2.20 U2.25 U2.26 U2.29 U2.38 U2.39 U2.43 U2.45 U2.46

## Polygon pours and split planes (outlines as drawn)
GND on Bottom Layer "NONET_L-01_P-001" (solid, pour order 0): 0,60 60,60 60,0 0,0
GND on Top Layer "NONET_L-01_P-001" (solid, pour order 1): 0,60 60,60 60,0 0,0

## Other copper
Top Layer:
  rectangle net USBVCC: 20.8,7.23 22.2,10.13
  region net 3.3V: 25.2,35.457 24.7,35.457 24.602,35.437 24.518,35.382 24.463,35.298 24.443,35.2 24.463,35.102 24.518,35.018 24.602,34.963 24.7,34.943 25.2,34.943 25.2,34.75 24.2,34.75 24.2,30.8 15.5,30.8 15.5,35.65 25.2,35.65
  region net 3.3V: 12.525,17.2 18.325,17.2 18.325,16.175 21.1,16.175 32,16.175 35.33,16.175 35.33,17.4 32,17.4 32,19.1 21.1,19.1 21.1,25.5 15.5,25.5 15.5,18.275 12.525,18.275
  region net MAIN_VCC: 12.525,16.1 16.8,16.1 16.8,12.3 15.5,12.3 15.5,15.025 12.525,15.025
  region: 0.3,52.3 7.7,52.3 7.7,59.7 4,59.7 ccw(c4,56) 0.3,56
  region: 52.3,59.7 52.3,52.3 59.7,52.3 59.7,56 ccw(c56,56) 56,59.7
  region: 59.7,7.7 52.3,7.7 52.3,0.3 56,0.3 ccw(c56,4) 59.7,4
  region: 7.7,0.3 7.7,7.7 0.3,7.7 0.3,4 ccw(c4,4) 4,0.3
Bottom Layer:
  rectangle net 3.3V: 15.5,23.8 16.9,32.4
  rectangle net 3.3V: 33.454,16.164 42.6,17.4
  rectangle net USBVCC: 20.8,7.23 21.6,10.13
  region net MAIN_VCC: 15.5,14.1 16.8,14.1 16.8,12.3 15.5,12.3
  region net 3.3V: 38.525,18.6 41.3,18.6 41.3,16.45 38.525,16.45
  region: 0.3,52.3 7.7,52.3 7.7,59.7 4,59.7 ccw(c4,56) 0.3,56
  region: 52.3,59.7 52.3,52.3 59.7,52.3 59.7,56 ccw(c56,56) 56,59.7
  region: 59.7,7.7 52.3,7.7 52.3,0.3 56,0.3 ccw(c56,4) 59.7,4
  region: 7.7,0.3 7.7,7.7 0.3,7.7 0.3,4 ccw(c4,4) 4,0.3

## Silkscreen, mask and mechanical layers (free items; w line width, h text height)
Top Overlay:
  text "PB1" at 8.2,50.016 h1.3 r270
  text "PB0" at 8.2,46.516 h1.3 r270
  text "VCC" at 8.2,43.019 h1.3 r270
  text "GND" at 8.2,39.518 h1.3 r270
  text "PA1" at 8.2,36.016 h1.3 r270
  text "LoRa_TX=PA9 / LoRa_RX=PA10 / LoRa_M0=PB14 / LoRa_M1=PB15" at 42,34.8 h1
  text "PA0" at 8.2,32.516 h1.3 r270
  text "VCC" at 8.2,29.019 h1.3 r270
  text "GND" at 51.8,26.982 h1.3 r90
  text "GND" at 8.2,25.518 h1.3 r270
  text "VCC" at 51.8,23.481 h1.3 r90
  text "PB11" at 8.2,22.395 h1.3 r270
  text "3V3" at 51.8,19.98 h1.3 r90
  text "PB10" at 8.2,18.895 h1.3 r270
  text "PB4" at 51.8,16.496 h1.3 r90
  text "SD_CS=  PA4 / SD_SCK= PA5 / SD_MISO=PA6 / SD_MOSI=PA7" at 42.7,15.9 h1
  text "VCC" at 8.2,15.019 h1.3 r270
  text "PB5" at 51.8,12.977 h1.3 r90
  text "GND" at 8.2,11.518 h1.3 r270
  text "PB6" at 51.8,9.482 h1.3 r90
  text "GND" at 8.981,7.305 h0.75
  text "CONVCC" at 14.8,7.305 h0.75
  text "SWCLK" at 8.106,4.765 h0.75
  text "MAINVCC" at 14.8,4.765 h0.75
  text "SWDIO" at 8.106,2.225 h0.75
  text "USBVCC" at 14.8,2.225 h0.75